# Altium PCB 串口版第5版.PcbDoc
Units mil, origin at the board's own origin, x right, y up, seen from the top; angles counter-clockwise.
Board outline 535 x 769 mil, 2 copper layers (Top Layer, Bottom Layer); 18 components, 18 nets, 65 pads, 12 vias.
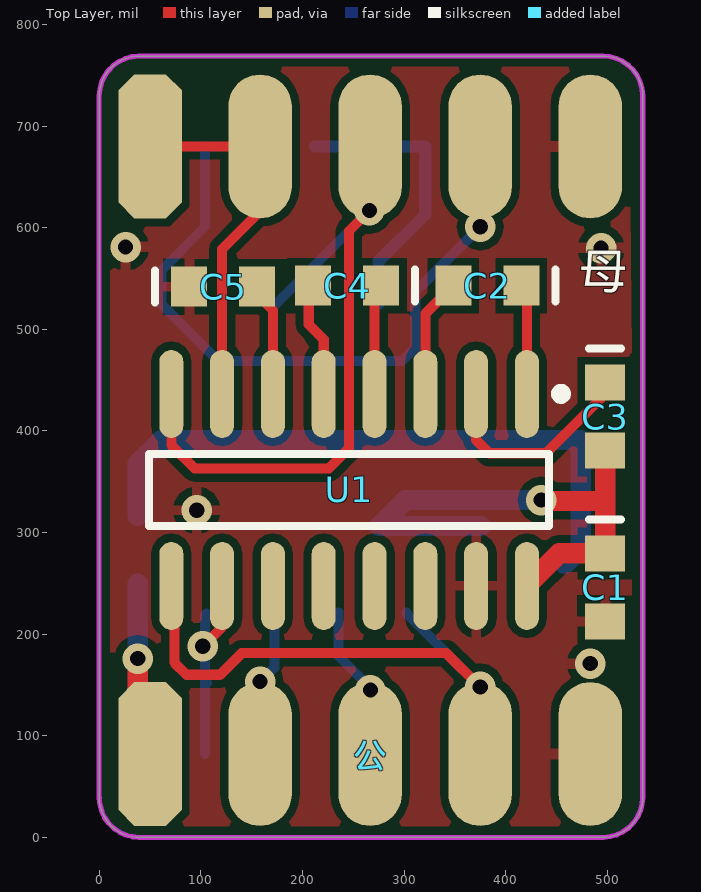
[diagram p0: Top Layer view]
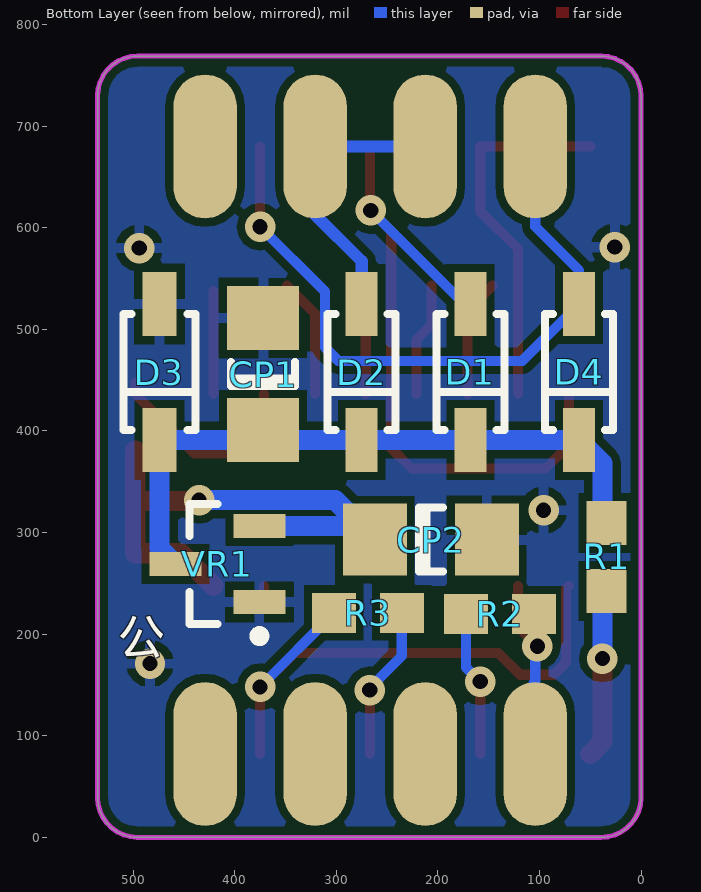
[diagram p1: Bottom Layer view, seen from below]
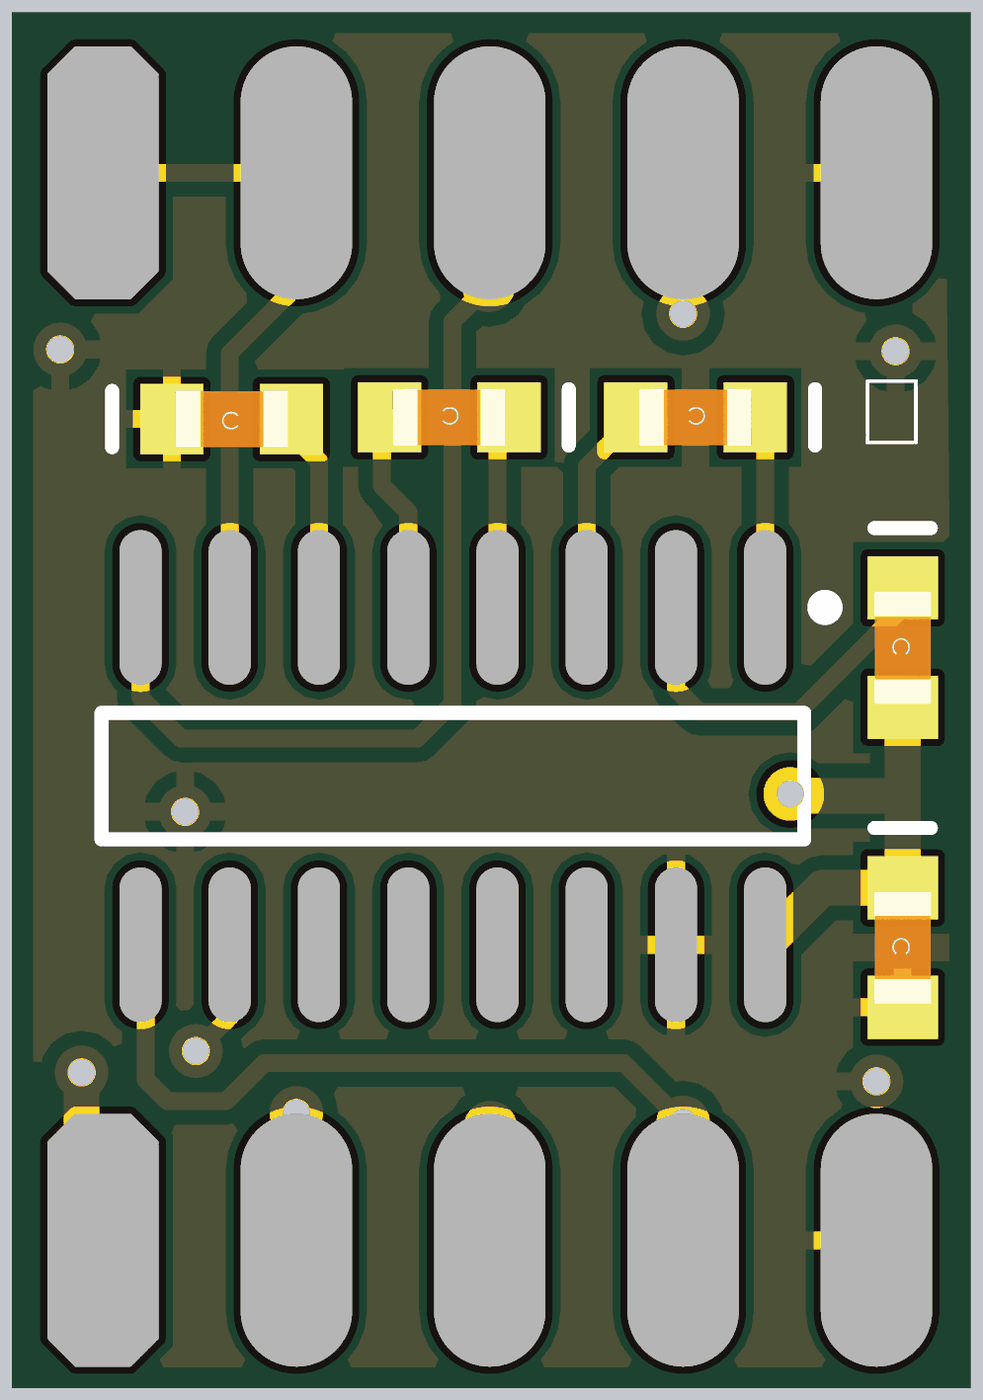
[diagram p2: 3D render of the assembled board from above, using the file's embedded part models]
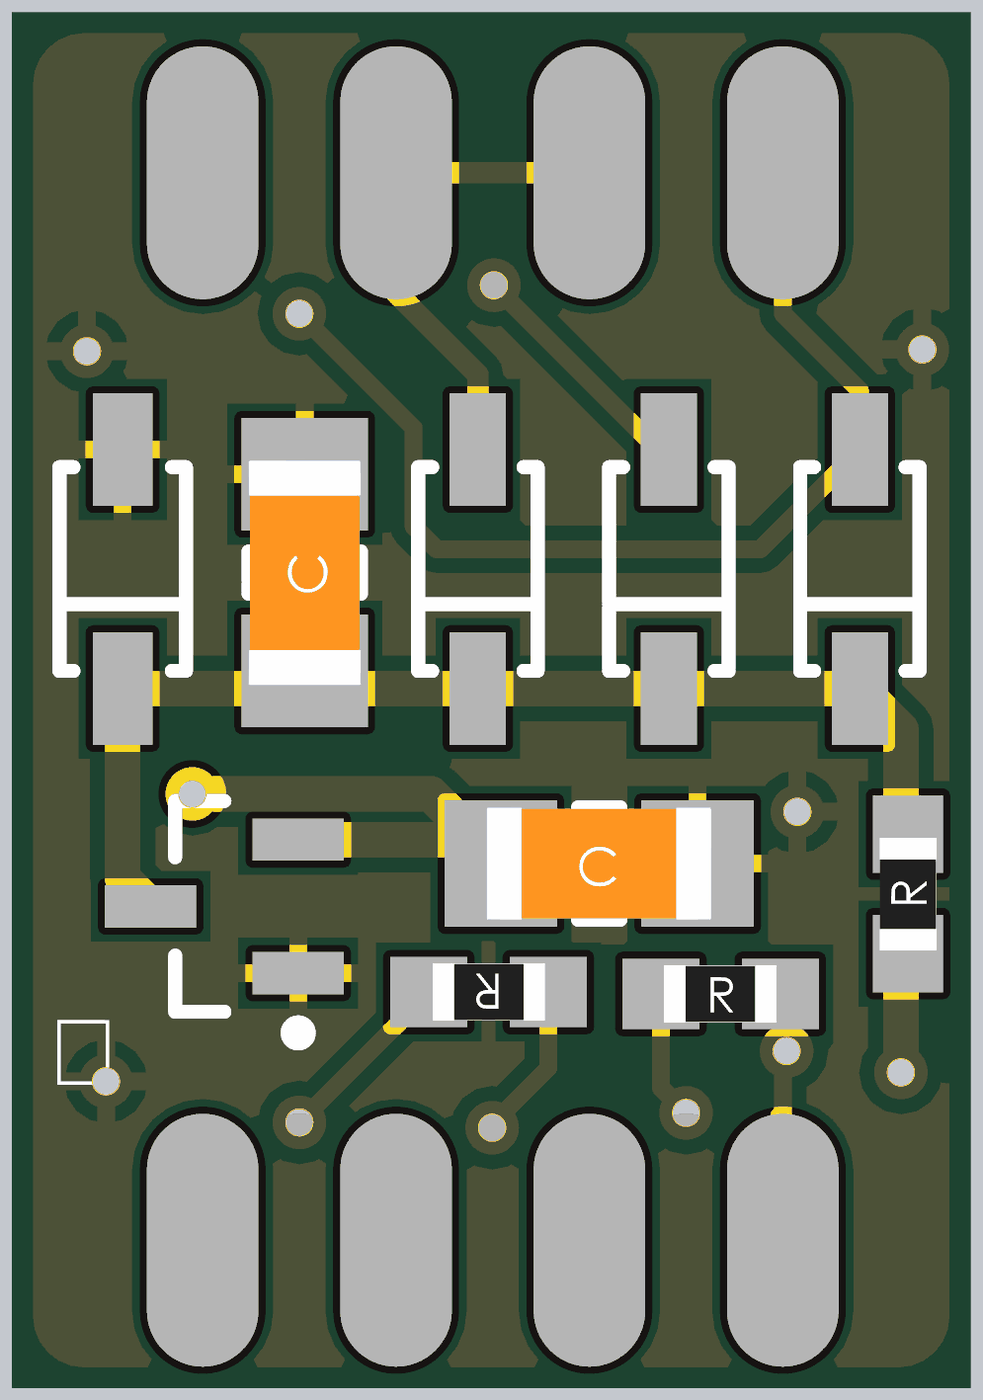
[diagram p3: 3D render of the assembled board from below, using the file's embedded part models]

## Layer stack, top to bottom
Top Layer: signal copper 1.4
Dielectric: dielectric 12.6, FR-4, Dk 4.8
Bottom Layer: signal copper 1.4

## Board outline
0,38.71 0,729.64 cw(c39.37,729.64) 38.71,769 495.63,769 cw(c495.63,729.63) 534.99,730.29 535,730.29 535,39.37 cw(c495.63,39.37) 496.29,0.01 496.29,0 39.37,0 cw(c39.37,39.37)

## Design rules (kind name [scope] priority, off if disabled: settings)
Clearance [All] p1: gap=8
PolygonConnect [All] p1: connectstyle=Relief reliefconductorwidth=10 reliefentries=4 polygonreliefangle="90 Angle"
RoomDefinition 串口板第6版 [InComponentClass('串口板第6版')] p1: confinementstyle=ConfineIn formatcopy=TRUE outline -154,-110 3589,-110 3589,789 -154,789
RoutingVias [All] p1: holewidth=18 width=32 viastyle="Through Hole" minholewidth=15 minwidth=30 maxholewidth=28 maxwidth=50
SilkscreenOverComponentPads [All] p1: minsilkscreentomaskgap=10
SolderMaskExpansion [All] p1: expansion=4
Width [All] p1: maxlimit=100 minlimit=6 preferedwidth=10
27 further rules are at their usual default settings.

## Components (designator, comment, footprint, x,y, rotation, side; value= is the part's Value field where it differs from the comment)
C1 "0.1uF" 1608[0603] 498,246 r270 top
C2 "0.1uF" 1608[0603] 382,543 r180 top
C3 "0.1uF" 1608[0603] 498,414 r270 top
C4 "0.1uF" 1608[0603] 244,543 r180 top
C5 "0.1uF" 1608[0603] 122,542 r0 top
CP1 "10uF/16V" 3216[1206] 372,456 r90 bottom
CP2 "10uF/16V" 3216[1206] 207,293 r180 bottom
D1 "IN4148W" SOD123 168,458 r270 bottom
D2 "IN4148W" SOD123 275,458 r270 bottom
D3 "MMSZ51T1" 425 474,458 r90 bottom
D4 "IN4148W" SOD123 61,458 r270 bottom
R1 "0R" 0603RT 34,276 r90 bottom
R2 "0R" 0603RT 139,220 r180 bottom
R3 "0R" 0603RT 269,221 r0 bottom
U1 "MAX3232ESE" NSO16_N 246,342 r270 top
VR1 "AS1360-33-T" SOT23_N 417,269 r0 bottom
公 "DB9" DB9BSM 50,82 r0 top (schematic designator 公1)
母 "DB9" DB9BSM 50,680 r0 top locked (schematic designator ĸ1)

## Footprints (in the part's own frame and the unit in brackets; to place one, negate y for a bottom-side part, rotate by r counter-clockwise, add the part's x,y. Pads: shape width x height; smd on the part's side, far side on the other; paste and mask are expansions set on the pad)
425 [mm] "SOD-123; 2 Leads; Body 2.7 x 1.6 mm, ("
  rect 1.6x0.85 smd: 1(-1.7,0) 2(1.7,0)
  silkscreen extent -1.45,-0.9 1.45,0.9
0603RT [mm]
  rect 1.1x1 smd: 1(-0.85,0) 2(0.85,0)
  body extent -1.3,-0.5 1.3,0.5, height 0.53
1608[0603] [mm]
  rect 0.9x1 smd: 1(-0.85,0) 2(0.85,0)
  silkscreen extent -1.7,-0.4 -1.7,0.4, body extent -1.3,-0.5 1.3,0.5, height 0.89
3216[1206] [mm]
  rect 1.6x1.8 smd: 1(-1.4,0) 2(1.4,0)
  silkscreen extent -0.3,-0.8 0.3,0.8, body extent -2.1,-0.9 2.1,0.9, height 0.95
DB9BSM [mil]
  oct 62.5x141.67 smd: 1(0,0)
  oval 62.5x141.67 smd: 2(108.33,0) 3(216.67,0) 4(325,0) 5(433.33,0)
  oval 62.5x141.67 smd far side: 6(54.17,0) 7(162.5,0) 8(270.83,0) 9(379.17,0)
NSO16_N [mm] "SOIC, 16-Leads, Body 9.9x3.9mm, Pitch 1.27mm, IPC Medium De"
  oval 2.2x0.6 smd: 1(-2.4,4.445) 2(-2.4,3.175) 3(-2.4,1.905) 4(-2.4,0.635) 5(-2.4,-0.635) 6(-2.4,-1.905) 7(-2.4,-3.175) 8(-2.4,-4.445) 9(2.4,-4.445) 10(2.4,-3.175) 11(2.4,-1.905) 12(2.4,-0.635) 13(2.4,0.635) 14(2.4,1.905) 15(2.4,3.175) 16(2.4,4.445)
  silkscreen extent -2.52,-5 0.9,5.42, body extent -2,-5 2,5, height 1.75
SOD123 [mm] "SOD-123; 2 Leads; Body 2.7 x 1.6 mm, ("
  rect 1.6x0.8 smd: 1(-1.7,0) 2(1.7,0)
  silkscreen extent -1.45,-0.85 1.45,0.85
SOT23_N [mm] "SOT23, 3-Leads, Body 2.9x1.3mm, Pitch 0.95mm, Lead Span 2.3mm, IPC Medium Den"
  rect 1.3x0.6 smd: 1(-1.05,0.95) 2(-1.05,-0.95) 3(1.05,0)
  silkscreen extent -1.17,-1.5 0.7,1.92, body extent -0.7,-1.5 0.7,1.5, height 1.1

## Part data
C1 C2 C3 C4 C5: library part CAP, "Capac"
CP1 CP2: library part CAPACITOR, "Tantalum Capac"
D1 D2 D4: library part DIODE, "DIODE"
D3: "Surface Mount Silicon Zener Diode"
R1 R2 R3: library part RES
U1: "3.0V TO 5.5V, Low-Power, up to 1Mbps, True RS-232 Transceiver Using Four 0.1礔 External Capacitor"
VR1: library part "Volt Reg", "Voltage Regulator"

## Via types
v1: diameter 30, hole 15, Top Layer to Bottom Layer, tented both sides, 11 vias
v2: diameter 30, hole 15, Top Layer to Bottom Layer, 1 vias

## Nets (pads, with @x,y where several pads share a name; then routed paths per layer and width w, separated by ;. In a path a pad name is that pad's centre, name@x,y a point inside that pad or via, vN(x,y) a via of type N, cw(c..) or ccw(c..) an arc to the next point about the centre after c; other vN are vias at no path point)
GND: C1.2 C5.1 CP1.2 CP2.2 D3.2 U1.15 VR1.1 公.5 母.5 | length 21.5
  Top Layer w10: U1.15@371,226 U1.15
  other v1: 483.33,171 96,322 494,580 26,581
NetC2_1: C2.1 U1.1 | length 101
  Top Layer w10: U1.1 C2.1@421,537.46
NetC2_2: C2.2 U1.3 | length 117.9
  Top Layer w10: U1.3 321,515.46 C2.2
NetC3_1: C3.1 U1.2 | length 213.2
  Top Layer w10: U1.2 371,391 384,378 439.68,378 498,436.32 C3.1
NetC4_1: C4.1 U1.4 | length 104.4
  Top Layer w10: U1.4 C4.1@271,540.88
NetC4_2: C4.2 U1.5 | length 112.6
  Top Layer w10: C4.2@206.19,543 206.19,504.81 221,490 U1.5
NetC5_2: C5.2 U1.6 | length 116.7
  Top Layer w10: C5.2@146.46,543 171,518.46 U1.6
NetD2_1: D2.1 母.7 母.8 | length 282.4
  Bottom Layer w12: 母.7 母.8 320.83,612.83 275,567 D2.1
NetD4_1: D4.1 母.4 母.6 | length 676
  Top Layer w10: v1(375,601) 母.4
  Bottom Layer w10: 母.6 104.17,601.17 61,558 D4.1 116.93,469 298,469 311,482 311,537 v1(375,601)
NetR2_1: R2.1 公.2 | length 143.9
  Top Layer w10: 公.2 v1(158.33,153.33)
  Bottom Layer w10: v1(158.33,153.33) 172.46,167.46 R2.1
NetR3_1: R3.1 公.3 | length 152.2
  Top Layer w10: 公.3 266.67,144.67 v1(267,145)
  Bottom Layer w10: R3.1 235.54,178.46 267,147 v1(267,145)
RX: U1.7 母.1 母.2 | length 367.3
  Top Layer w10: 母.1 母.2 158.33,616.33 121,579 U1.7
RXD0: R3.2 U1.9 公.4 | length 574.4
  Top Layer w10: U1.9 74,244.51 74,172 86,160 119,160 140.33,181.33 341.67,181.33 v1(375,148) 公.4
  Bottom Layer w10: R3.2 302.46,220.54 v1(375,148)
TX: D1.1 U1.8 母.3 | length 679.1
  Top Layer w10: U1.8 71,386 94,363 226,363 245.81,382.81 245.81,596.81 v1(266,617) 266.67,617.67 母.3
  Bottom Layer w10: D1.1@173.93,524.93 v1(266,617)
TXD0: R2.2 U1.10 公.6 | length 208.5
  Top Layer w10: v1(102,188) 121,207 U1.10
  Bottom Layer w10: 公.6 公.6@104.17,150.17 ; R2.2 104.17,218.63 公.6@104.17,150.17 ; 公.6@106,152 公.6@104.17,150.17
VCC: C1.1 C3.2 CP2.1 U1.16 VR1.2 | length 523.5
  Top Layer w20: U1.16 452.95,279.46 C1.1 498,331 ; v2(435,332) 436,331 498,331 ; C3.2 498,331
  Bottom Layer w20: 300.12,331 275.52,306.4 VR1.2 ; 301.12,332 v2(435,332)
VCC5V: R1.1 公.1 | length 172.5
  Top Layer w20: v1(38,176) 38,94 公.1
  Bottom Layer w20: v1(38,176) R1.1@38,249.54
VDD5V: CP1.1 D1.2 D2.2 D3.1 D4.2 R1.2 VR1.3 | length 625.7
  Bottom Layer w20: R1.2@38,316.46 38,368.07 D4.2 D1.2 D2.2 D3.1 474,284.66 VR1.3
pads on no net: U1.11 U1.12 U1.13 U1.14 公.7 公.8 公.9 母.9

## Polygon pours and split planes (outlines as drawn)
GND on Bottom Layer "Top Layer-No Net" (solid, pour order 4): 1,769 535,769 535,3 534,2 533,1 0,1
GND on Top Layer "Top Layer-No Net" (solid, pour order 4): 1,768 535,768 535,2 534,1 533,0 0,0

## Keep-outs
Keep-Out Layer:
  the board outline again, w5

## Silkscreen, mask and mechanical layers (free items; w line width, h text height)
Drill Drawing:
  text ".Legend" at 677,6 h60